# Allegro board CHOPPING WAVE OSC.brd
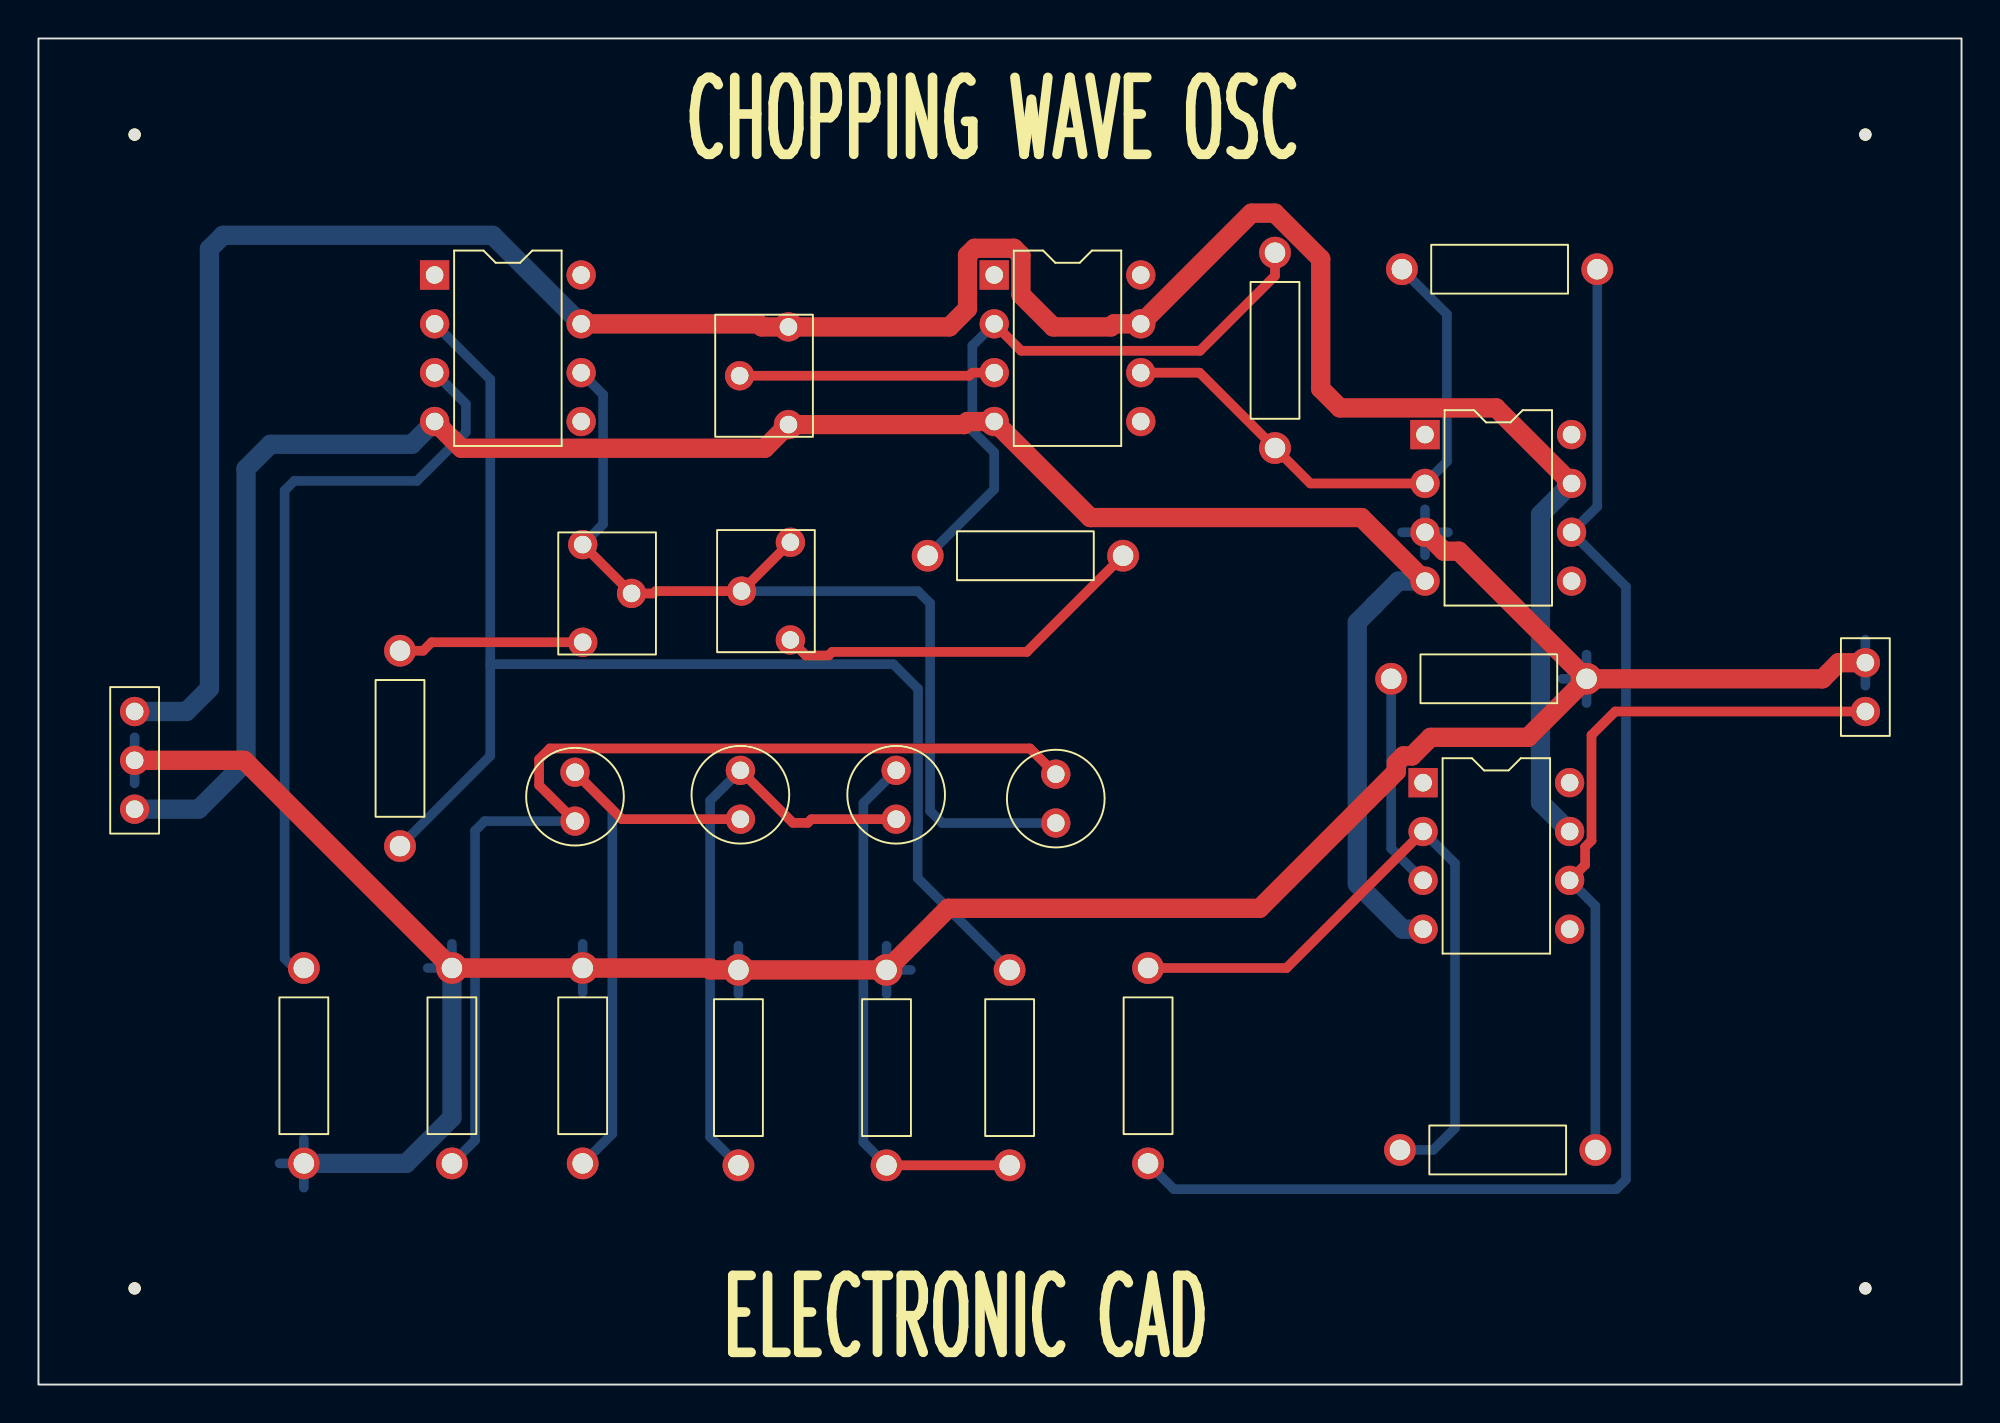
[diagram p0: board, top side]
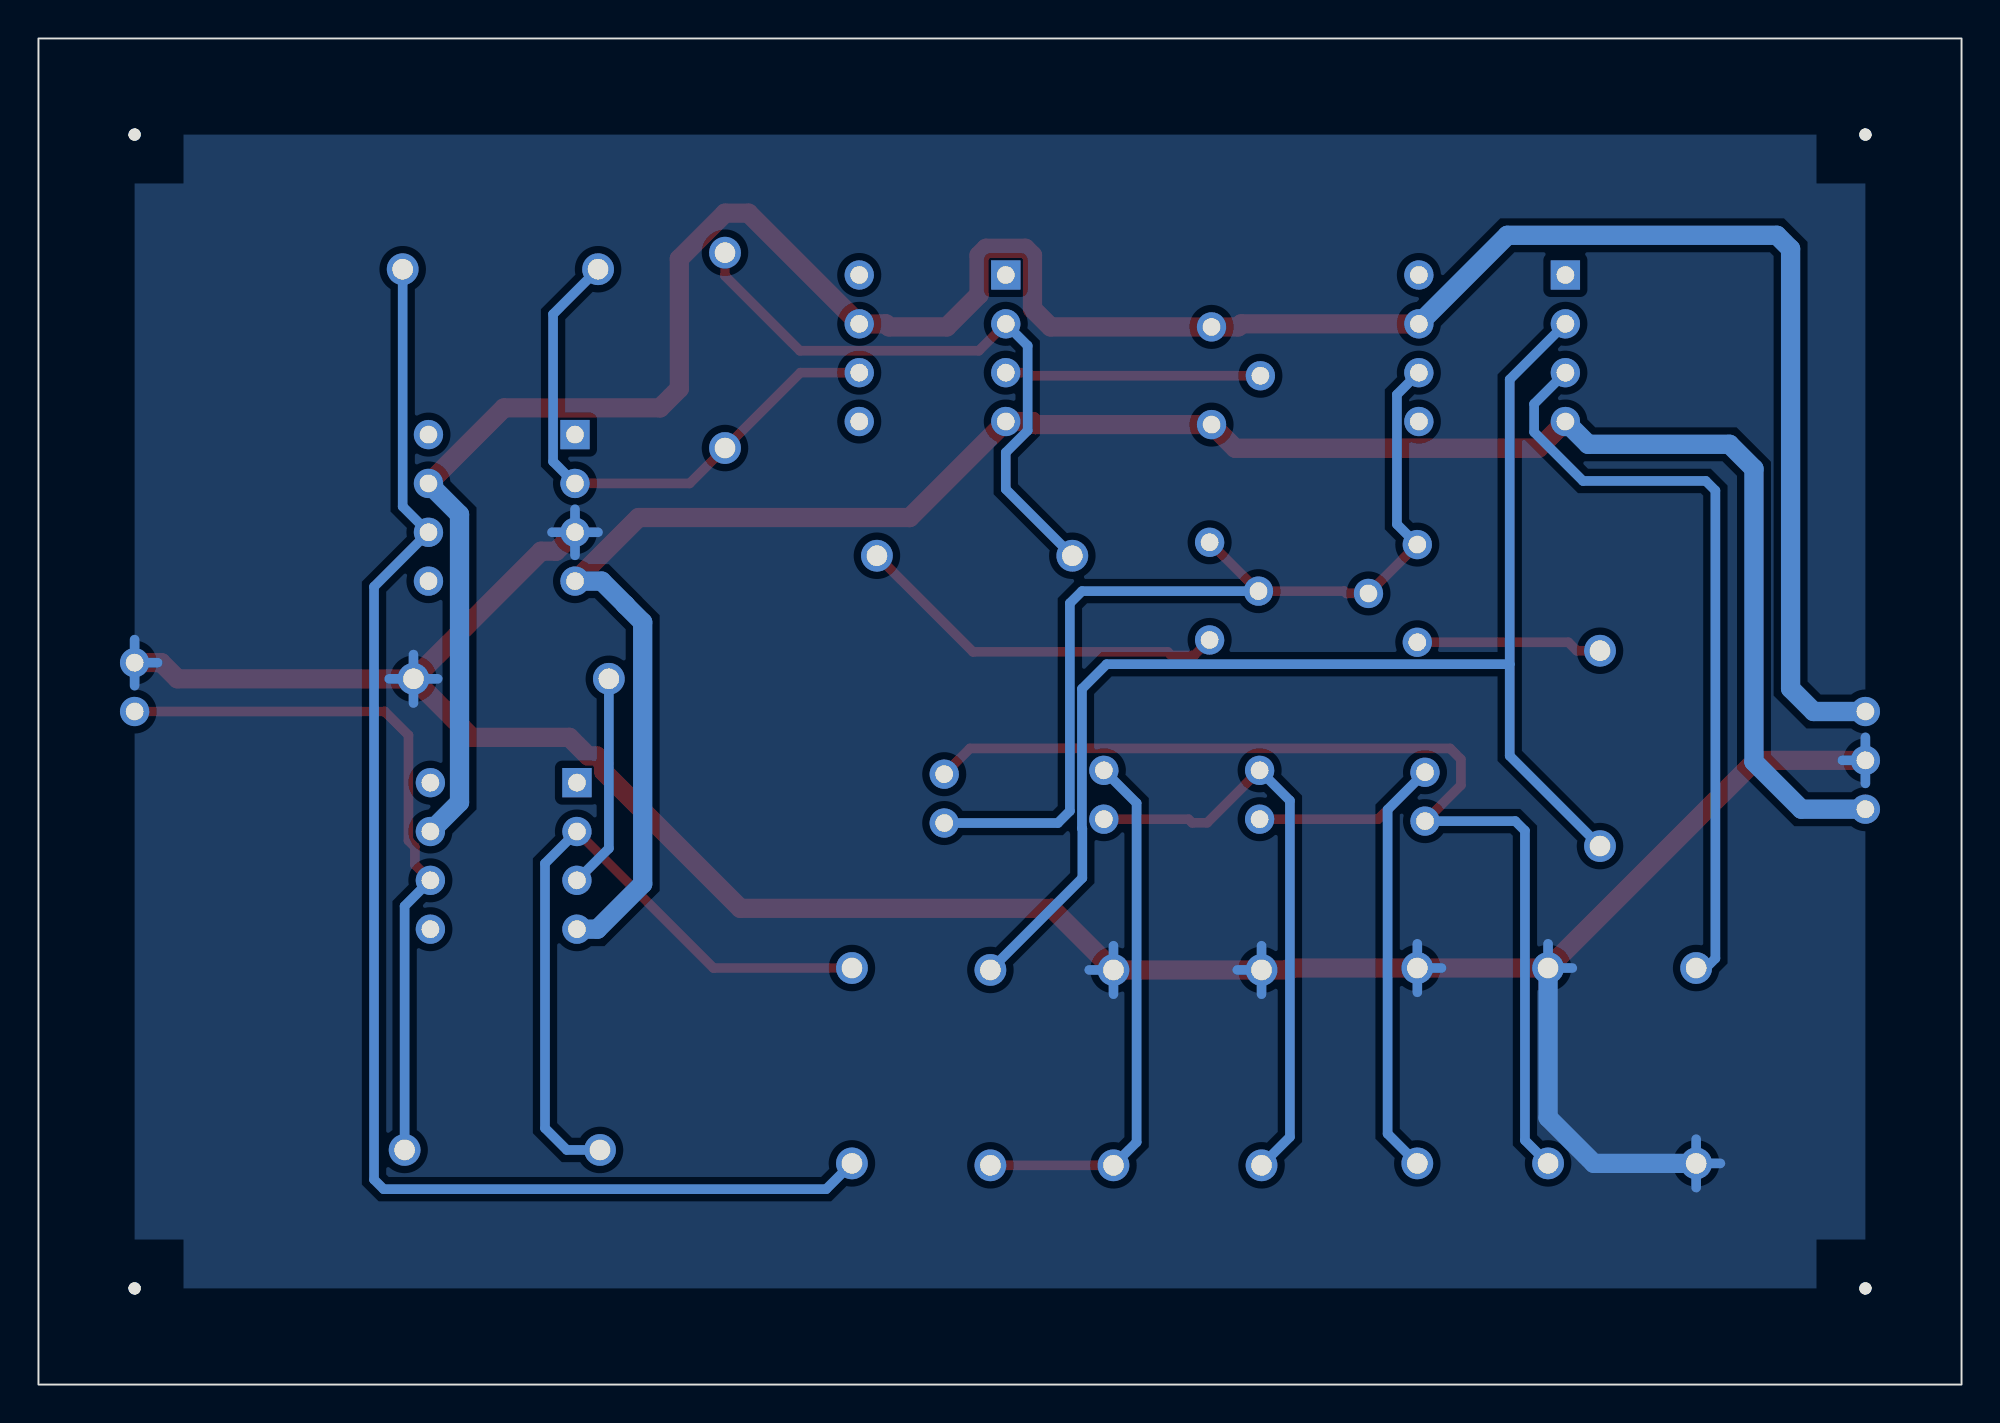
[diagram p1: board, bottom side, seen from below]

Outline 100 x 70 mm; copper layers: TOP, BOTTOM. Coordinates in mm from the lower left corner of the outline.
Outline path: rectangle 0,0 100,70

## Design rules (mm)
constraint set DEFAULT: min track width 0.5, pair gap 0.5
net group POWERWORKS: nets +12V -12V

## Placement (name value [footprint] x y rotation side)
C1  0.01uF  [CAP196]  52.9 29.2 0 top
C2  0.01uF  [CAP196]  27.9 29.3 0 top
C3  0.01uF  [CAP196]  36.5 29.4 0 top
C4  0.01uF  [CAP196]  44.6 29.4 0 top
J1  CON3  [JUMPER3]  5 35 270 top
J2  CON2  [JUMPER2]  95 35 90 top
NOREF  -  [unnamed]  5 5 0 top
NOREF#2  -  [unnamed]  5 65 0 top
NOREF#3  -  [#2]  0 70 0 top
NOREF#4  -  [unnamed]  95 65 0 top
NOREF#5  -  [#2]  100 0 90 top
NOREF#6  -  [unnamed]  95 5 0 top
R1  4.7k  [RES400]  21.5 11.5 0 top
R2  4.7k  [RES400]  28.3 11.5 0 top
R3  4.7k  [RES400]  36.4 11.4 0 top
R4  4.7k  [RES400]  44.1 11.4 0 top
R5  10k  [RES400]  50.5 11.4 0 top
R6  15k  [RES400]  18.8 28 0 top
R7  470k  [RESADJ]  28.3 38.6 180 top
R8  1k  [RES400]  13.8 11.5 0 top
R9  100k  [RESADJ]  39.1 43.8 0 top
R10  20k  [RES400]  56.4 43.1 90 top
R11  10k  [RES400]  64.3 48.7 0 top
R12  10K  [RESADJ]  39 55 0 top
R13  8.2k  [RES400]  70.9 58 270 top
R14  2.2k  [RES400]  57.7 11.5 0 top
R15  10k  [RES400]  70.8 12.2 270 top
R16  5.1k  [RES400]  80.5 36.7 90 top
U1  LF356  [DIP8_3]  20.6 57.7 0 top
U2  LF356  [DIP8_3]  49.7 57.7 0 top
U3  LF356  [DIP8_3]  72.1 49.4 0 top
U4  LF356  [DIP8_3]  72 31.3 0 top

## Library data of the parts
C1-C4 = CAP NP: Tolerance: ***; User Part Number: ***
J1 = CON3: User Part Number: ***
J2 = CON2: User Part Number: ***
R1-R6 R8 R10 R11 R13-R16 = R: Tolerance: ***; User Part Number: ***
R7 R9 R12 = POT: Tolerance: ***; User Part Number: ***
U1-U4 = LF356: Tolerance: ***; User Part Number: ***

## Footprints (pads in the part's own frame, mm; a bottom-side part is the same pattern mirrored in y, then rotated)
CAP196
  round 1.524 hole 0.914: 1(0,0) 2(0,2.54)
DIP8_3
  rect 1.524x1.524 hole 0.914: 1(0,0)
  round 1.524 hole 0.914: 2(0,-2.54) 3(0,-5.08) 4(0,-7.62) 5(7.62,-7.62) 6(7.62,-5.08) 7(7.62,-2.54) 8(7.62,0)
JUMPER2
  round 1.524 hole 0.914: 1(0,0) 2(2.54,0)
JUMPER3
  round 1.524 hole 0.914: 1(0,0) 2(2.54,0) 3(5.08,0)
RES400
  round 1.651 hole 1.067: 1(0,0) 2(0,10.16)
RESADJ
  round 1.524 hole 0.914: 1(0,0) 2(-2.54,-2.54) 3(0,-5.08)
unnamed
  round 0.635 hole 3.175 unplated: (0,0)

## Nets
+12V: J1.1 R12.1 U1.7 U2.7 U3.7 U4.7
-12V: J1.3 R12.3 U1.4(V-) U2.4(V-) U3.4(V-) U4.4(V-)
GND: J1.2 J2.2 R1.2 R2.2 R3.2 R4.2 R8.1 R16.1 U3.3
OUT: J2.1 R15.2 U4.6
SIG: R11.1 R13.1 U2.6 U3.2
N00480: C1.2 C2.1 R1.1
N00493: C2.2 C3.1 R2.1
N00531: C3.2 C4.1 R3.1
N00551: C4.2 R4.1 R5.1
N00565: C1.1 R7.2(WIPER) R7.3 R9.1 R9.2(WIPER) U1.6
N00623: R6.2 R7.1
N00627: R5.2 R6.1 U1.2
N00657: R8.2 U1.3
N00777: R9.3 R10.1
N00781: R10.2 R11.2 U2.2
N00836: R12.2(WIPER) U2.3
N01756: R13.2 R14.1 U3.6
N01760: R14.2 R15.1 U4.2
N01789: R16.2 U4.3

Pads without a net: U1 1 5 8; U2 1 5 8; U3 1 5 8; U4 1 5 8

## Routing (per net, layer and track width the routed paths; a pad name or vN(x,y) marks a point on that pad's centre or on a via; arc(x,y) is an arc through that point)
+12V: length 138.2
  TOP w1: U1.7 37.45,55.16 37.61,55 R12.1 47.37,55 48.31,55.94 48.31,58.72 48.68,59.09 50.72,59.09 51.09,58.72 51.09,56.68 52.77,55 55.77,55 55.93,55.16 U2.7 63.08,60.91 64.3,60.91 66.67,58.54 66.67,51.79 67.67,50.79 75.79,50.79 U3.7
  BOTTOM w1: U4.7 78.11,30.27 78.11,45.24 U3.7 ; J1.1 7.7,35 8.89,36.2 8.89,59.05 9.6,59.76 23.62,59.76 U1.7
-12V: length 111.4
  TOP w1: U3.4 68.8,45.09 54.7,45.09 U2.4 48.31,50.08 48.15,49.92 R12.3 37.77,48.69 21.99,48.69 U1.4
  BOTTOM w1: U1.4 19.41,48.9 12.06,48.9 10.79,47.62 10.79,32.38 8.33,29.92 J1.3 ; U4.4 70.94,23.68 68.58,26.04 68.58,39.64 69.48,40.54 69.48,40.55 70.71,41.78 U3.4
GND: length 164.1
  TOP w1: R16.1 92.77,36.7 93.61,37.54 J2.2 ; R16.1 77.45,33.66 72.39,33.66 71.42,32.69 70.98,32.69 70.61,32.32 70.61,31.88 63.5,24.77 47.3,24.77 R4.2 R3.2 34.95,21.56 34.95,21.66 R2.2 R1.2 10.7,32.46 J1.2 ; R16.1 73.86,43.34 73.08,43.34 U3.3
  BOTTOM w0.5: 93.8,37.54 J2.2 ; J2.2 95,36.34 ; J2.2 95,38.74 ; 21.5,22.92 R1.2 20.24,21.66 ; 70.9,44.32 U3.3 ; U3.3 73.3,44.32 ; U3.3 72.1,45.52 ; U3.3 72.1,43.12 ; 12.54,11.5 R8.1 ; R8.1 13.8,10.24 ; R8.1 13.8,12.76 ; 79.24,36.7 R16.1 ; R16.1 81.76,36.7 ; R16.1 80.5,35.44 ; R16.1 80.5,37.96 ; 28.3,20.4 R2.2 ; R2.2 27.04,21.66 ; R2.2 28.3,22.92 ; R4.2 45.36,21.56 ; R4.2 44.1,22.82 ; R4.2 44.1,20.3 ; J1.2 6.2,32.46 ; J1.2 5,31.26 ; J1.2 5,33.66 ; 36.4,20.3 R3.2 ; R3.2 36.4,22.82 ; R3.2 37.66,21.56
  BOTTOM w1: R8.1 19.12,11.5 21.5,13.88 R1.2
OUT: length 37.3
  TOP w0.5: J2.1 81.99,35 80.76,33.77 80.76,28.29 80.43,27.96 80.43,27.03 U4.6
  BOTTOM w0.5: R15.2 80.96,24.88 U4.6
SIG: length 29.7
  TOP w0.5: U3.2 66.14,46.86 R11.1 60.38,52.62 U2.6
  BOTTOM w0.5: U3.2 73.24,48 73.24,55.66 R13.1
N00480: length 54.8
  TOP w0.5: C1.2 51.56,33.08 26.59,33.08 26.04,32.52 26.04,31.16 C2.1
  BOTTOM w0.5: C2.1 23.2,29.3 22.7,28.8 22.7,12.7 R1.1
N00493: length 31.4
  TOP w0.5: C3.1 30.34,29.4 C2.2
  BOTTOM w0.5: C2.2 29.84,29.89 29.84,13.04 R2.1
N00531: length 31.1
  TOP w0.5: C3.2 39.23,29.21 40.01,29.21 40.2,29.4 C4.1
  BOTTOM w0.5: C3.2 34.92,30.36 34.92,12.88 R3.1
N00551: length 28.1
  TOP w0.5: R4.1 R5.1
  BOTTOM w0.5: C4.2 42.9,30.24 42.9,12.6 R4.1
N00565: length 50.5
  TOP w0.5: R7.3 R7.2 31.98,41.14 32.1,41.26 R9.2 R9.1
  BOTTOM w0.5: R7.3 29.36,44.74 29.36,51.48 U1.6 ; C1.1 46.99,29.2 46.37,29.82 46.37,40.63 45.74,41.26 R9.2
N00623: length 9.7
  TOP w0.5: R6.2 20,38.16 20.44,38.6 R7.1
N00627: length 69.7
  BOTTOM w0.5: 23.5,37.46 23.5,32.7 R6.1 ; 23.5,37.46 44.45,37.46 45.74,36.18 45.74,28.93 45.72,28.91 45.72,26.34 R5.2 ; 23.5,37.46 23.5,52.27 U1.2
N00657: length 40
  BOTTOM w0.5: U1.3 22.23,50.99 22.23,49.53 19.68,46.99 13.3,46.99 12.8,46.49 12.8,22.16 13.3,21.66 R8.2
N00777: length 19.8
  TOP w0.5: R9.3 39.91,37.91 41.09,37.91 41.27,38.1 51.4,38.1 R10.1
N00781: length 32.4
  TOP w0.5: R11.2 64.3,57.66 60.4,53.76 51.1,53.76 U2.2
  BOTTOM w0.5: U2.2 48.56,54.02 48.56,49.61 49.7,48.47 49.7,46.56 R10.2
N00836: length 13.3
  TOP w0.5: U2.3 48.56,52.62 48.4,52.46 R12.2
N01756: length 74.7
  BOTTOM w0.5: R13.2 81.06,45.66 U3.6 82.55,41.49 82.55,10.66 82.05,10.16 59.04,10.16 R14.1
N01760: length 36.7
  TOP w0.5: U4.2 64.9,21.66 R14.2
  BOTTOM w0.5: U4.2 73.66,27.1 73.66,13.34 72.53,12.2 R15.1
N01789: length 11.2
  BOTTOM w0.5: U4.3 70.34,27.88 R16.2

## Copper pours and planes (outline as drawn; the poured copper is in the pictures)
GND on BOTTOM: 95,5 95,65 5,65 5,5 ; 2 cut-outs

## Text on the board
Ref Des/Silkscreen Top: CHOPPING WAVE OSC | ELECTRONIC CAD
DIMENSION: FIGURE | FINISHED_SIZE | 0.914 | 1.067 | 3.175 | DRILL CHART: TOP to BOTTOM | ALL UNITS ARE IN MILLIMETERS | PLATED | NON-PLATED | QTY | 54 | 26 | 4
